# Altium PCB PCB.PcbDoc
Units mil, origin at the board's own origin, x right, y up, seen from the top; angles counter-clockwise.
Board outline 6000 x 4000 mil, 2 copper layers (Top Layer, Bottom Layer); 35 components, 59 nets, 179 pads, 14 vias.
Unrouted connection lines stored in the file: 17.
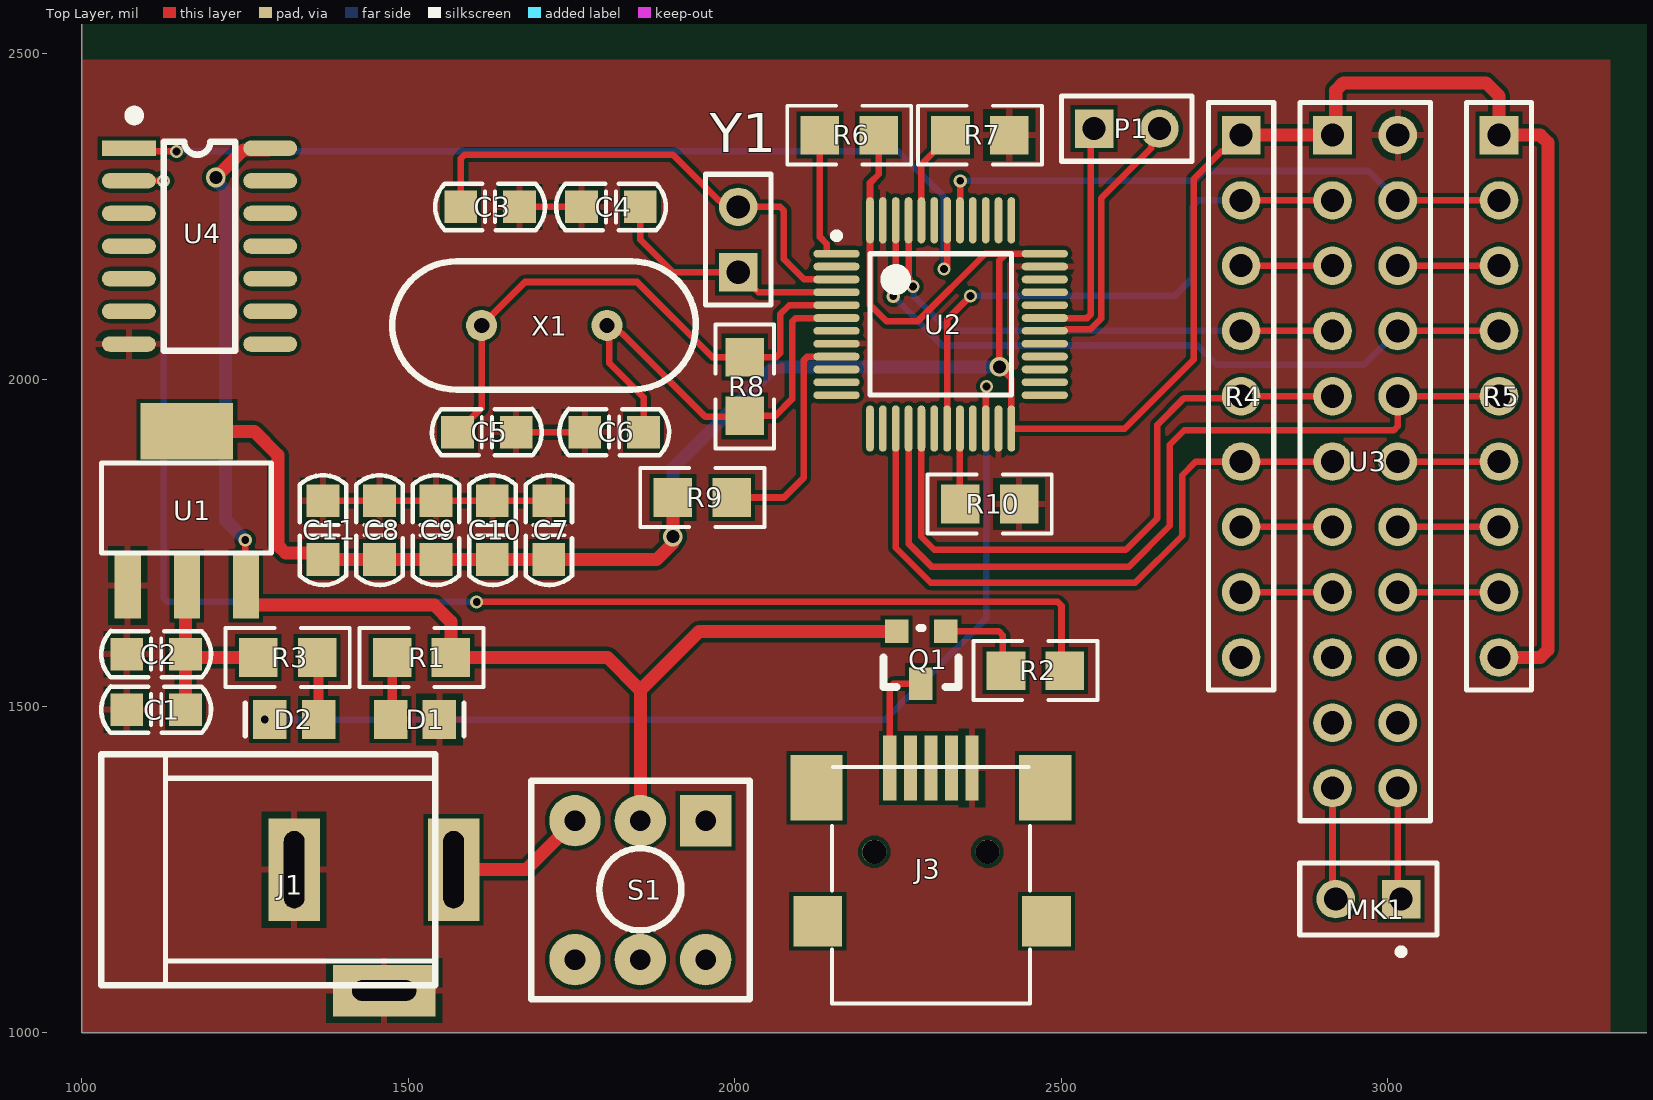
[diagram p0: Top Layer view]
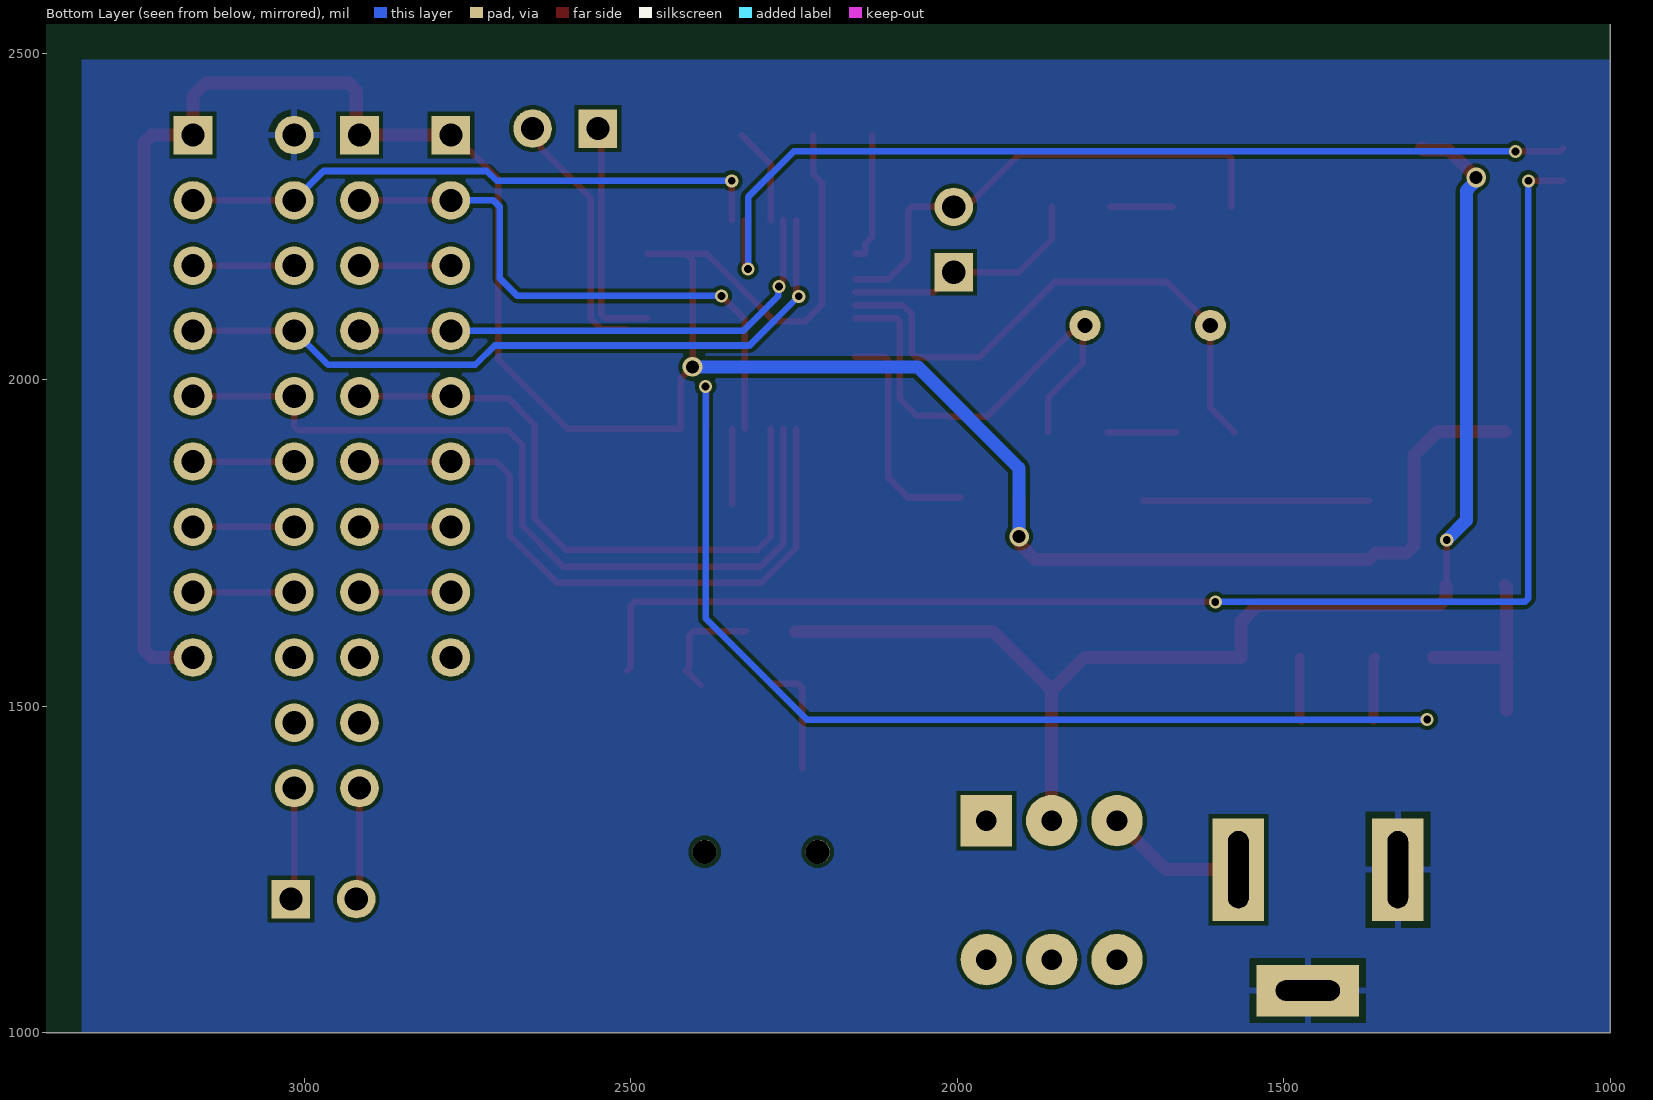
[diagram p1: Bottom Layer view, seen from below]
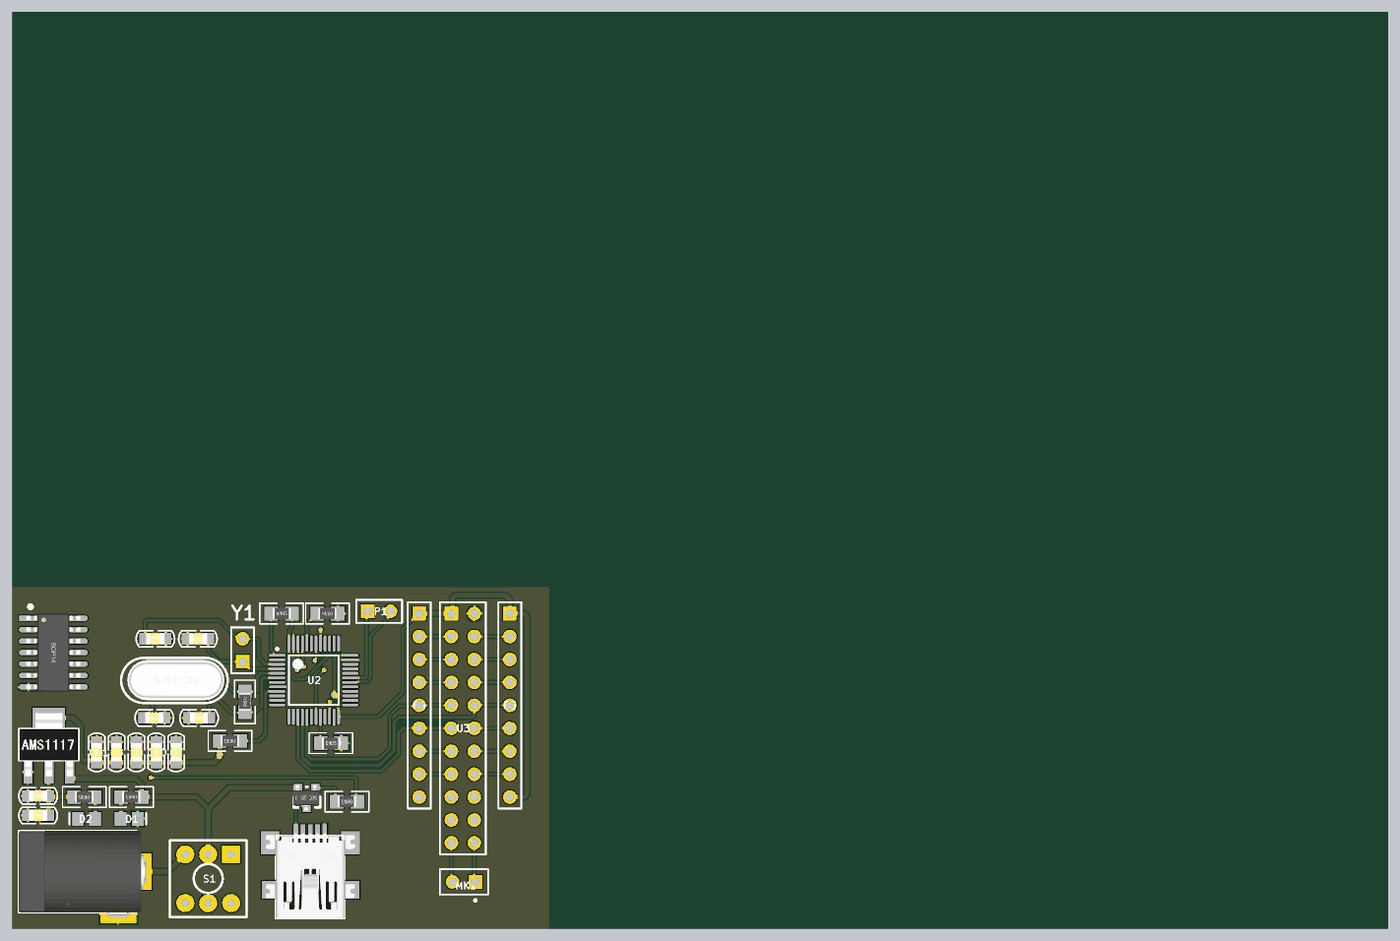
[diagram p2: 3D render of the assembled board from above, using the file's embedded part models]

## Layer stack, top to bottom
Top Solder: solder mask 0.4, Solder Resist, Dk 3.5
Top Layer: signal copper 1.4
Dielectric 1: dielectric 12.6, FR-4, Dk 4.8
Bottom Layer: signal copper 1.4
Bottom Solder: solder mask 0.4, Solder Resist, Dk 3.5

## Board outline
1000,1000 7000,1000 7000,5000 1000,5000

## Design rules (kind name [scope] priority, off if disabled: settings)
Clearance [All] p1: gap=6 ignorepadtopadclearanceinfootprint=FALSE
PolygonConnect [All] p1: connectstyle=Relief reliefconductorwidth=10 reliefentries=4 polygonreliefangle="90 Angle" airgapwidth=10
RoutingVias [All] p1: holewidth=28 width=50 viastyle="Through Hole" minholewidth=28 minwidth=50 maxholewidth=28 maxwidth=50
SolderMaskExpansion [All] p1: expansion=4 istentingtop=FALSE
Width [All] p1: maxlimit=30 minlimit=10 preferedwidth=10
30 further rules are at their usual default settings.

## Components (designator, comment, footprint, x,y, rotation, side; value= is the part's Value field where it differs from the comment)
C1 "220uF" C0805 1113.54,1495 r180 top
C2 "104" C0805 1113.54,1580 r180 top
C3 "15P" C0805 1625,2265 r180 top
C4 "15P" C0805 1810,2265 r0 top
C5 "22pF" C0805 1620,1920 r0 top value=20pF
C6 "22pF" C0805 1815,1920 r180 top value=20pF
C7 "104" C0805 1715,1770 r90 top value=100nF
C8 "104" C0805 1455.57,1770 r90 top value=100nF
C9 "104" C0805 1542.05,1770 r90 top value=100nF
C10 "104" C0805 1628.52,1770 r90 top value=100nF
C11 "106" C0805 1369.09,1770 r90 top value=100nF
D1 "LED" LED_0805 1510,1480 r0 top
D2 "LED0" LED_0805 1325,1480 r180 top
J1 "PWR2.5" DC-005 1325,1250 r180 top
J3 "Mini-USB" "USB1 - duplicate" 2300,1045 r180 top
MK1 "Mic2" PIN2 3020,1205 r180 top
P1 "Header 2" HDR1X2 2550,2385 r0 top
Q1 "S8550" SOT-23 2285,1575 r180 top
R1 "Res1" R0805 1520,1575 r180 top value=1K
R2 "200R" R0805 2460,1555 r180 top
R3 "Res1" R0805 1315,1575 r180 top value=1K
R4 "10K" HDR1X9 2775,2375 r270 top
R5 "10K" HDR1X9 3170,2375 r270 top
R6 "0R" R0805 2175,2375 r0 top
R7 "10K" R0805 2375,2375 r180 top
R8 "1M" R0805 2015,1990 r90 top
R9 "0R" R0805 1950,1820 r180 top
R10 "10K" R0805 2390,1810 r0 top
S1 "SW-SPST" BTN8.5*8.5 1955,1325 r270 top
U1 "ASM1117-3.3" SOT-223 1070,1685 r0 top
U2 "STM32F103C8T6" 48P 2315,2085 r0 top
U3 "LD3320模块" HDR2X11_CEN 2915,2375 r270 top
U4 "74HC04" SOP14_M 1180,2205 r0 top
X1 "8M" XTAL 1804,2083.42 r180 top value=8MHz
Y1 "32.768K" HDR1X2 2005,2165 r90 top

## Footprints (in the part's own frame and the unit in brackets; to place one, negate y for a bottom-side part, rotate by r counter-clockwise, add the part's x,y. Pads: shape width x height; smd on the part's side, far side on the other; paste and mask are expansions set on the pad)
48P [mm]
  oval 1.8x0.3 smd: 1(-4.05,2.75) 2(-4.05,2.25) 3(-4.05,1.75) 4(-4.05,1.25) 5(-4.05,0.75) 6(-4.05,0.25) 7(-4.05,-0.25) 8(-4.05,-0.75) 9(-4.05,-1.25) 10(-4.05,-1.75) 11(-4.05,-2.25) 12(-4.05,-2.75) 25(4.05,-2.75) 26(4.05,-2.25) 27(4.05,-1.75) 28(4.05,-1.25) 29(4.05,-0.75) 30(4.05,-0.25) 31(4.05,0.25) 32(4.05,0.75) 33(4.05,1.25) 34(4.05,1.75) 35(4.05,2.25) 36(4.05,2.75)
  oval 0.3x1.8 smd: 13(-2.75,-4.05) 14(-2.25,-4.05) 15(-1.75,-4.05) 16(-1.25,-4.05) 17(-0.75,-4.05) 18(-0.25,-4.05) 19(0.25,-4.05) 20(0.75,-4.05) 21(1.25,-4.05) 22(1.75,-4.05) 23(2.25,-4.05) 24(2.75,-4.05) 37(2.75,4.05) 38(2.25,4.05) 39(1.75,4.05) 40(1.25,4.05) 41(0.75,4.05) 42(0.25,4.05) 43(-0.25,4.05) 44(-0.75,4.05) 45(-1.25,4.05) 46(-1.75,4.05) 47(-2.25,4.05) 48(-2.75,4.05)
  silkscreen extent -4.17,-2.75 2.75,3.57, body extent -3.5,-3.5 3.5,3.5, height 1.6
BTN8.5*8.5 [mm]
  rect 2x2 hole 0.8: 1(0,0)
  round 2 hole 0.8: 2(0,-2.54) 3(0,-5.08) 4(5.4,-5.08) 5(5.4,-2.54) 6(5.4,0)
  silkscreen extent -1.55,-6.79 6.95,1.71
C0805 [mil]
  rect 50x50 smd: 1(-45,0) 2(45,0)
  silkscreen extent -84,-36 84,36, body extent -39,-25 40,24, height 20
DC-005 [mm] "5.5*2.1mm，DC30V,2.5A"
  rect 2x4 hole 0.8 slot 3 at 90 deg: 1(-6.2,0) 2(0,0)
  rect 4x2 hole 0.8 slot 2.5 at 0 deg: 3(-3.5,4.7)
  silkscreen extent -5.48,-4.5 7.5,4.5, body extent -6.55,-4.5 7.5,4.8, height 11.2
HDR1X2 [mm] "Connector; Header; 2 Position"
  rect 1.5x1.5 hole 0.9: 1(0,0)
  round 1.5 hole 0.9: 2(2.54,0)
  silkscreen extent -1.27,-1.27 3.81,1.27
HDR1X9 [mm] "Connector; Header; 9 Position"
  rect 1.5x1.5 hole 0.9: 1(0,0)
  round 1.5 hole 0.9: 2(2.54,0) 3(5.08,0) 4(7.62,0) 5(10.16,0) 6(12.7,0) 7(15.24,0) 8(17.78,0) 9(20.32,0)
  silkscreen extent -1.27,-1.27 21.59,1.27
HDR2X11_CEN [mm] "Connector; Header; 11x2 Position"
  rect 1.5x1.5 hole 0.9: 1(0,0)
  round 1.5 hole 0.9: 2(2.54,0) 3(5.08,0) 4(7.62,0) 5(10.16,0) 6(12.7,0) 7(15.24,0) 8(17.78,0) 9(20.32,0) 10(22.86,0) 11(25.4,0) 12(0,2.54) 13(2.54,2.54) 14(5.08,2.54) 15(7.62,2.54) 16(10.16,2.54) 17(12.7,2.54) 18(15.24,2.54) 19(17.78,2.54) 20(20.32,2.54) 21(22.86,2.54) 22(25.4,2.54)
  silkscreen extent -1.27,-1.27 26.67,3.81
LED_0805 [mm]
  rect 1.3x1.5 smd: 1(-0.95,0) 2(0.95,0)
  silkscreen extent 1.91,-0.64 1.91,0.64
PIN2 [mm] "Photosensitive Diode; 2 Leads"
  rect 1.5x1.5 hole 0.9: 1(0,0)
  round 1.5 hole 0.9: 2(2.54,0)
  silkscreen extent -1.4,-1.4 3.94,2.17
R0805 [mm]
  rect 1.5x1.5 smd: 1(-1.143,0) 2(1.143,0)
  silkscreen extent -2.41,-1.14 2.41,1.14, body extent -0.99,-0.64 1.01,0.62, height 0.55
SOP14_M [mm] "8.7*6.2*1.8mm（长宽高）"
  rect 2.1x0.6 smd: 1(-2.75,3.81)
  oval 2.1x0.6 smd: 2(-2.75,2.54) 3(-2.75,1.27) 4(-2.75,0) 5(-2.75,-1.27) 6(-2.75,-2.54) 7(-2.75,-3.81) 8(2.75,-3.81) 9(2.75,-2.54) 10(2.75,-1.27) 11(2.75,0) 12(2.75,1.27) 13(2.75,2.54) 14(2.75,3.81)
  silkscreen extent -2.67,-4.06 1.4,5.21, body extent -3,-4.35 3,4.35, height 1.9
SOT-23 [mil]
  rect 36x36 smd: 1(-37.5,-40) 2(37.5,-40)
  rect 36x50 smd: 3(0.5,40)
  silkscreen extent -58,-45 58,45, body extent -54,-52 60,58
SOT-223 [mm]
  rect 1.016x2.54 smd: 1(0,0) 2(2.3,0) 3(4.6,0)
  rect 3.6x2.2 smd: 2(2.3,6)
  silkscreen extent -1.02,1.27 5.59,4.77, body extent -0.95,-0.5 5.55,6.5, height 1.85
"USB1 - duplicate" [mm]
  rect 0.508x2.54 smd: 1(1.6,-9.162) 2(0.8,-9.162) 3(0,-9.162) 4(-0.8,-9.162) 5(-1.6,-9.162)
  rect 2.032x2.54 smd: 6(4.445,-8.4) 9(-4.445,-8.4)
  rect 1.9x1.95 smd: 7(-4.5,-3.2) 8(4.4,-3.2)
  round 0.94 hole 0.94 unplated: 10(-2.2,-5.9) 11(2.2,-5.9)
  silkscreen extent -3.85,-9.2 3.85,0, body extent -4.95,-9.46 4.95,-0.06, height 3.9
XTAL [mm]
  round 1.2 hole 0.6: 1(0,0) 2(4.88,0)
  silkscreen extent -3.45,-2.5 8.35,2.5, body extent -3.11,-2.29 7.69,2.21, height 3.5

## Part data
C1: library part 有极性电容, "10uF"
C2: library part 无极性电容, "30pF"
C3 C4: library part CAP
C5 C6 C7 C8 C9 C10 C11: library part CAP1, "Capacitor", Tolerate=50V, PCB_Layout="Top Layer SMC", Publisher=ZL_A0OFFICE, Revision=2012-3-28
  C5 C6: ERP=0103020090, TOL=2%
  C7 C8 C9 C10 C11: ERP=0103020075, TOL=10%
D1: library part LED0, "Typical INFRARED GaAs LED", LatestRevisionDate=08-Jul-2005, LatestRevisionNote="Mech Layer 1 removed.", PackageReference=LED-0, Published=8-Jun-2000, Publisher="Altium Limited"
D2: "Typical INFRARED GaAs LED", LatestRevisionDate=08-Jul-2005, LatestRevisionNote="Mech Layer 1 removed.", PackageReference=LED-0, Published=8-Jun-2000, Publisher="Altium Limited"
J1: "Low Voltage Power Supply Connector", ComponentLink1Description="Manufacturer Link", ComponentLink1URL=http://domino.kycon.com/internet/Products.html, DatasheetDocument=09-May-2002, Published=17-Dec-2003, Publisher="Altium Limited"
J3: library part "Header 5", "Header, 5-Pin"
MK1: "Microphone", LatestRevisionDate=17-Jul-2002, LatestRevisionNote="Re-released for DXP Platform.", PackageReference=PIN2, Published=24-Mar-1999, Publisher="Altium Limited"
P1: "Header, 2-Pin", LatestRevisionDate=17-Jul-2002, LatestRevisionNote="Re-released for DXP Platform.", Publisher="Altium Limited"
Q1: library part PNP, "PNP三极管"
R1 R3: "Resistor", LatestRevisionDate=17-Jul-2002, LatestRevisionNote="Re-released for DXP Platform.", PackageReference=AXIAL-0.3, Published=8-Jun-2000, Publisher="Altium Limited"
R2: library part Resistor, "DIP"
R4 R5: library part "Header 9", "Header, 9-Pin", LatestRevisionDate=17-Jul-2002, LatestRevisionNote="Re-released for DXP Platform.", Publisher="Altium Limited"
R6 R7 R8 R9 R10: library part R
U1: library part "Volt Reg", "Voltage Regulator", LatestRevisionDate=29-May-2009, LatestRevisionNote="IPC-7351 Footprint Added.", PackageDescription="3-Pin Transistor Outline Package 2.54 mm Pitch, 15.1 mm Lead Span", PackageReference=D2PAK, Published=24-Mar-1999, Publisher="Altium Limited"
U3: library part LD3320模块2
U4: library part 74HC05
X1: library part XTAL_SMD, "Crystal Oscillator", Tolerate="ROSON -20_+70 20pf", ERP=0103040021, PCB_Layout="Top Layer SMC", Publisher=ZL_A0OFFICE, Revision=2012-3-28, TOL=±20ppm
Y1: library part CRYSTAL, "晶振"

## Via types
v1: diameter 20, hole 12, Top Layer to Bottom Layer, 11 vias
v2: diameter 30, hole 20, Top Layer to Bottom Layer, 3 vias

## Nets (pads, with @x,y where several pads share a name; then routed paths per layer and width w, separated by ;. In a path a pad name is that pad's centre, name@x,y a point inside that pad or via, vN(x,y) a via of type N, cw(c..) or ccw(c..) an arc to the next point about the centre after c; other vN are vias at no path point)
3V3: C1.1 C2.1 C7.1 C8.1 C9.1 C10.1 C11.1 R3.2 R4.1 R5.1 R5.9 R6.2 R9.2 U1.2 U2.24 U2.36 U2.48 U3.1 | length 4998.2
  Top Layer w10: R6.2 2220,2315 2206.73,2301.73 U2.48 2206.73,2115.24 2232.36,2089.61 2279.61,2089.61 2383.27,2193.27 2415,2193.27 ; U2.36 2415,2193.27 ; R4.1 2750.47,2350.47 2745.47,2350.47 2702.32,2307.32 2702.32,2030.97 2596.9,1925.55 U2.24 2423.27,2001.73 v2(2405,2020) 2405,2183.27 2415,2193.27
  Top Layer w20: C1.1 1158.54,1570 C2.1@1163.54,1575 ; U1.2@1160.55,1685 1158.54,1682.99 C2.1 C2.1@1163.54,1575 ; U1.2@1160.55,1921.22 1263.78,1921.22 1300,1885 1300,1746.72 1311.72,1735 1359.09,1735 C11.1 C8.1 C9.1 C10.1 C7.1 1880,1725 1905,1750 R9.2 ; R3.2 C2.1@1163.54,1575 ; R4.1 U3.1 2920,2380 2920,2443.28 2931.72,2455 3150,2455 3170,2435 R5.1 3233.28,2375 3245,2363.28 3245,1586.72 3233.28,1575 R5.9
  Bottom Layer w20: v2(1905,1760) 1905,1865 2060,2020 v2(2405,2020) v2@2410,2020
5V: Q1.2 R1.1 S1.2 U1.3 U4.14 | length 2086.2
  Top Layer w10: v1(1250,1755) 1250,1686.1 U1.3
  Top Layer w20: v2(1205,2310) 1247.39,2352.39 1285.66,2352.39 U4.14 ; U1.3 1251.1,1665.24 1261.1,1655.24 1539.76,1655.24 1565,1630 R1.1 1805,1575 1855,1525 ; S1.2 1855,1525 ; Q1.2 1945,1615 1855,1525
  Bottom Layer w20: v2@1205,2305.38 1206.91,2305.38 1210,2302.29 1210,2300 1219.99,2290.01 1219.99,1785.01 v1(1250,1755)
BOOT0: R7.2 U2.44 | length 149
  Top Layer w10: U2.44 2285.47,2330.47 R7.2
GND: C1.2 C2.2 C3.1 C4.1 C5.2 C6.2 C7.2 C8.2 C9.2 C10.2 C11.2 D1.2 J1.2 J1.3 J3.5 R7.1 R10.2 U1.1 U2.8 U2.23 U2.35 U2.47 U3.12 U4.7 | length 545.9
  Top Layer w10: C11.2 C8.2 C9.2 C10.2 C7.2 ; C5.2 C6.2 ; C3.1 C4.1
LD_A0: R5.3 U3.14 | length 155
  Top Layer w10: U3.14 R5.3
LD_CS: R4.4 U2.45 U3.4 | length 782.6
  Top Layer w10: U2.45 2265.79,2155.86 2267.78,2153.87 2267.78,2150.47 2272.4,2145.84 v1(2272.4,2143.14) ; R4.4 U3.4
  Bottom Layer w10: v1(2272.4,2143.14) 2273.48,2142.05 2273.48,2128.86 2327.35,2075 R4.4
LD_IRQ: R4.2 U2.19 U3.2 | length 896.9
  Top Layer w10: U2.19 2324.84,2092.67 v1(2360.79,2128.62) ; R4.2 U3.2
  Bottom Layer w10: v1(2360.79,2128.62) 2673.09,2128.62 2700,2155.53 2700,2265 2710,2275 R4.2
LD_P0: R4.5 U2.17 U3.5 | length 985.1
  Top Layer w10: U2.17 2285.16,1925.24 2285.16,1759.84 2305,1740 2598.72,1740 2646.86,1788.14 2646.86,1931.32 2687.75,1972.21 2772.21,1972.21 R4.5 U3.5
LD_P1: R5.5 U2.16 U3.16 | length 1303.1
  Top Layer w10: U2.16 2265.79,1749.5 2301.64,1713.65 2602.83,1713.65 2665.87,1776.69 2665.87,1900.87 2688.13,1923.13 3009.14,1923.13 3015,1928.99 U3.16 R5.5
LD_P2: R4.6 U2.15 U3.6 | length 1005
  Top Layer w10: U2.15 2246.1,1743.04 2299.86,1689.27 2612.76,1689.27 2684.8,1761.31 2684.8,1854.09 2705.71,1875 R4.6 U3.6
LD_RD: R4.3 U3.3 | length 140
  Top Layer w10: R4.3 U3.3
LD_RST: R5.2 U2.41 U3.13 | length 910.6
  Top Layer w10: U2.41 2344.87,2244.79 2344.87,2275.6 2345,2275.73 v1(2345,2305) ; U3.13 R5.2
  Bottom Layer w10: v1(2345,2305) 2705,2305 2720,2320 2970,2320 U3.13
LD_WR: R5.4 U2.46 U3.15 | length 1110.4
  Top Layer w10: v1(2242.4,2128.14) 2242.4,2130.84 2246.1,2134.54 U2.46 ; U3.15 R5.4
  Bottom Layer w10: v1(2242.4,2128.14) 2314.86,2055.67 2317.79,2052.74 2693.36,2052.74 2696.48,2052.74 2708.07,2052.74 2737.6,2023.21 2963.21,2023.21 U3.15
LED: D2.2 U2.22 | length 1589.1
  Top Layer w10: U2.22 2383.9,1988.9 v1(2385,1990)
  Bottom Layer w10: v1(1280,1480) 2230,1480 2385,1635 v1(2385,1990)
NetC5_1: C5.1 R8.2 U2.5 X1.2 | length 865.5
  Top Layer w10: C5.1 1611.87,1956.87 X1.2 1678.45,2150 1850,2150 1965,2035 R8.2 2063.17,2035 2069.02,2040.86 2069.02,2100.63 2082.92,2114.53 U2.5
NetC6_1: C6.1 R8.1 U2.6 X1.1 | length 723.2
  Top Layer w10: C6.1 1860,1973.58 1807.6,2025.98 1807.6,2079.83 X1.1 1807.6,2083.42 1814.08,2083.42 1825.89,2071.61 1826.81,2071.61 1954.96,1943.46 R8.1@2010.69,1943.46 ; R8.1 2061.81,1945 2087.51,1970.7 2087.51,2088.98 2093.36,2094.84 U2.6
NetD1_1: D1.1 R1.2 | length 96
  Top Layer w15: D1.1 1475,1482.4 R1.2
NetD2_1: D2.1 R3.1 | length 96
  Top Layer w15: R3.1 1362.4,1572.6 D2.1
NetJ1_1: J1.1 S1.3 | length 217
  Top Layer w20: J1.1 1680,1250 S1.3
NetJ3_1: J3.1 Q1.3 | length 173.2
  Top Layer w10: J3.1 2237.28,1405.99 2237.28,1529.14 2243.14,1535 Q1.3
NetMK1_1: MK1.1 U3.22 | length 172.1
  Top Layer w10: U3.22 3015,1210 MK1.1
NetMK1_2: MK1.2 U3.11 | length 172.1
  Top Layer w10: U3.11 2915,1210 MK1.2
NetQ1_1: Q1.1 R2.2 | length 178
  Top Layer w10: Q1.1 2404.14,1615 2410,1609.14 2410,1560 R2.2 R2.2@2392.5,1532.5
NetR4_7: R4.7 U3.7 | length 140
  Top Layer w10: R4.7 U3.7
NetR4_8: R4.8 U3.8 | length 140
  Top Layer w10: R4.8 U3.8
NetR5_6: R5.6 U3.17 | length 155
  Top Layer w10: U3.17 R5.6
NetR5_7: R5.7 U3.18 | length 155
  Top Layer w10: U3.18 R5.7
NetR5_8: R5.8 U3.19 | length 155
  Top Layer w10: U3.19 R5.8
NRST: U2.7
OUT: R2.1 U4.2 | length 2173.5
  Top Layer w10: U4.2 v1(1125,2305) ; v1(1604.49,1660) 2494.14,1660 2500,1654.14 2500,1560 R2.1
  Bottom Layer w10: v1(1125,2305) 1125,1665.86 1130.86,1660 v1(1604.49,1660)
PA0: U2.10
PA1: U2.11
PA2: U2.12
PA3: U2.13
PA4: U2.14
PA8: U2.29
PA9: P1.2 U2.30 | length 422.2
  Top Layer w10: U2.30 2504.47,2075.16 2507.25,2077.94 2544.86,2077.94 2561,2094.07 2561,2278.57 2637.23,2354.8 2637.23,2358.95 2650,2371.73 P1.2
PA10: P1.1 U2.31 | length 359.3
  Top Layer w10: U2.31 2539.14,2094.84 2545,2100.7 2545,2380 P1.1
PA11: U2.32
PA12: U2.33
PB0: U2.18
PB2: R10.1 U2.20 | length 115.7
  Top Layer w10: U2.20 2344.53,1810.47 R10.1
PB6: U2.42 U4.1 | length 1465.8
  Top Layer w10: U4.1 1076.73,2350 v1(1145,2350) ; v1(2320,2170) 2324.84,2174.84 U2.42
  Bottom Layer w10: v1(1145,2350) 2250,2350 2320,2280 v1(2320,2170)
PB7: U2.43
PB10: U2.21
PB12: U2.25
PB13: U2.26
PB14: U2.27
PB15: U2.28
PC13: U2.2
PC14: C3.2 U2.3 Y1.2 | length 774.7
  Top Layer w10: C3.2 1580,2339.14 1585.86,2345 1905,2345 1975.61,2274.39 1995.61,2274.39 Y1.2 2069.14,2265 2075,2259.14 2075,2185 2106.1,2153.9 U2.3
PC15: C4.2 U2.4 Y1.1 | length 384
  Top Layer w10: C4.2 1855,2215 1905,2165 Y1.1 2035.79,2134.21 U2.4
TCLK: U2.37
TDI/PA15: U2.38
TDO/PB3: U2.39
TMS: U2.34
TRST/PB4: U2.40
VBAT: R6.1 U2.1 | length 200.6
  Top Layer w10: R6.1 2130,2218.82 2140.5,2208.32 2140.5,2194.1 2141.34,2193.27 U2.1
VDDA: R9.1 U2.9 | length 355.3
  Top Layer w10: R9.1 2075,1820 2105,1850 2105,2029.93 2110.86,2035.79 U2.9
pads on no net: J3.2 J3.3 J3.4 J3.6 J3.7 J3.8 J3.9 J3.10 J3.11 R4.9 S1.1 S1.4 S1.5 S1.6 U3.9 U3.10 U3.20 U3.21 U4.3 U4.4 U4.5 U4.6 U4.8 U4.9 U4.10 U4.11 U4.12 U4.13

## Polygon pours and split planes (outlines as drawn)
GND on Top Layer "GND_L01_P000" (solid, pour order 0): 1000,2490 3340,2490 3340,1000 1000,1000
GND on Bottom Layer "GND_L02_P001" (solid, pour order 1): 1000,2490 3340,2490 3340,1000 1000,1000

## Silkscreen, mask and mechanical layers (free items; w line width, h text height)
Mechanical 1:
  lines w10: 1000,1000 1000,2490.66 3340,2490.66 3340,1000 1000,1000